# Altium PCB recall_mcu_v0_2.PcbDoc
Units mil, origin at the board's own origin, x right, y up, seen from the top; angles counter-clockwise.
Board outline 1000 x 1000 mil, 2 copper layers (Component Side, Bottom Layer), stack 12.8 mil thick; 13 components, 10 nets, 42 pads, 5 vias.
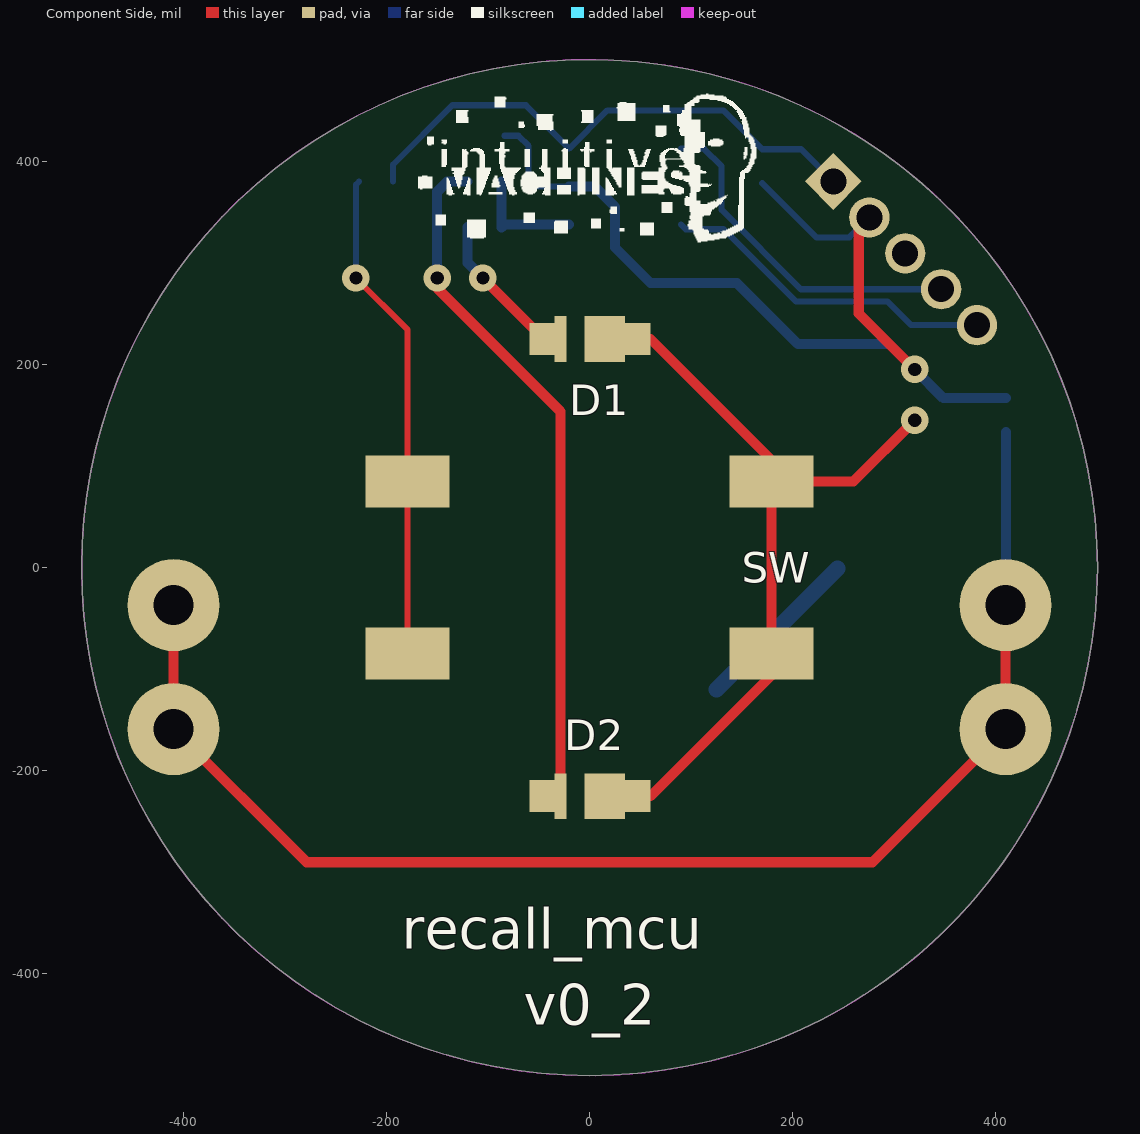
[diagram p0: Component Side view]
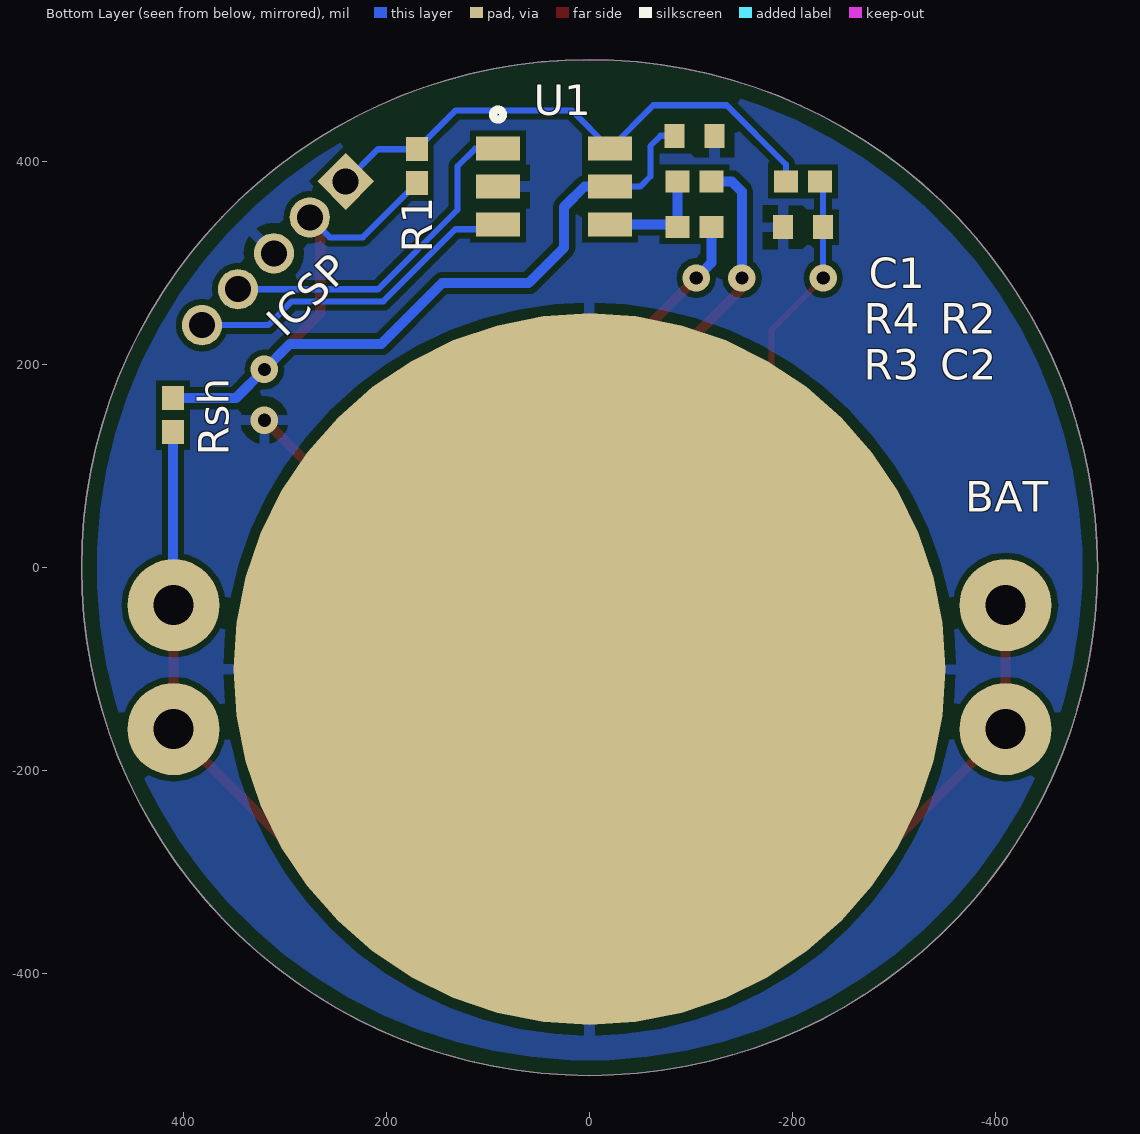
[diagram p1: Bottom Layer view, seen from below]
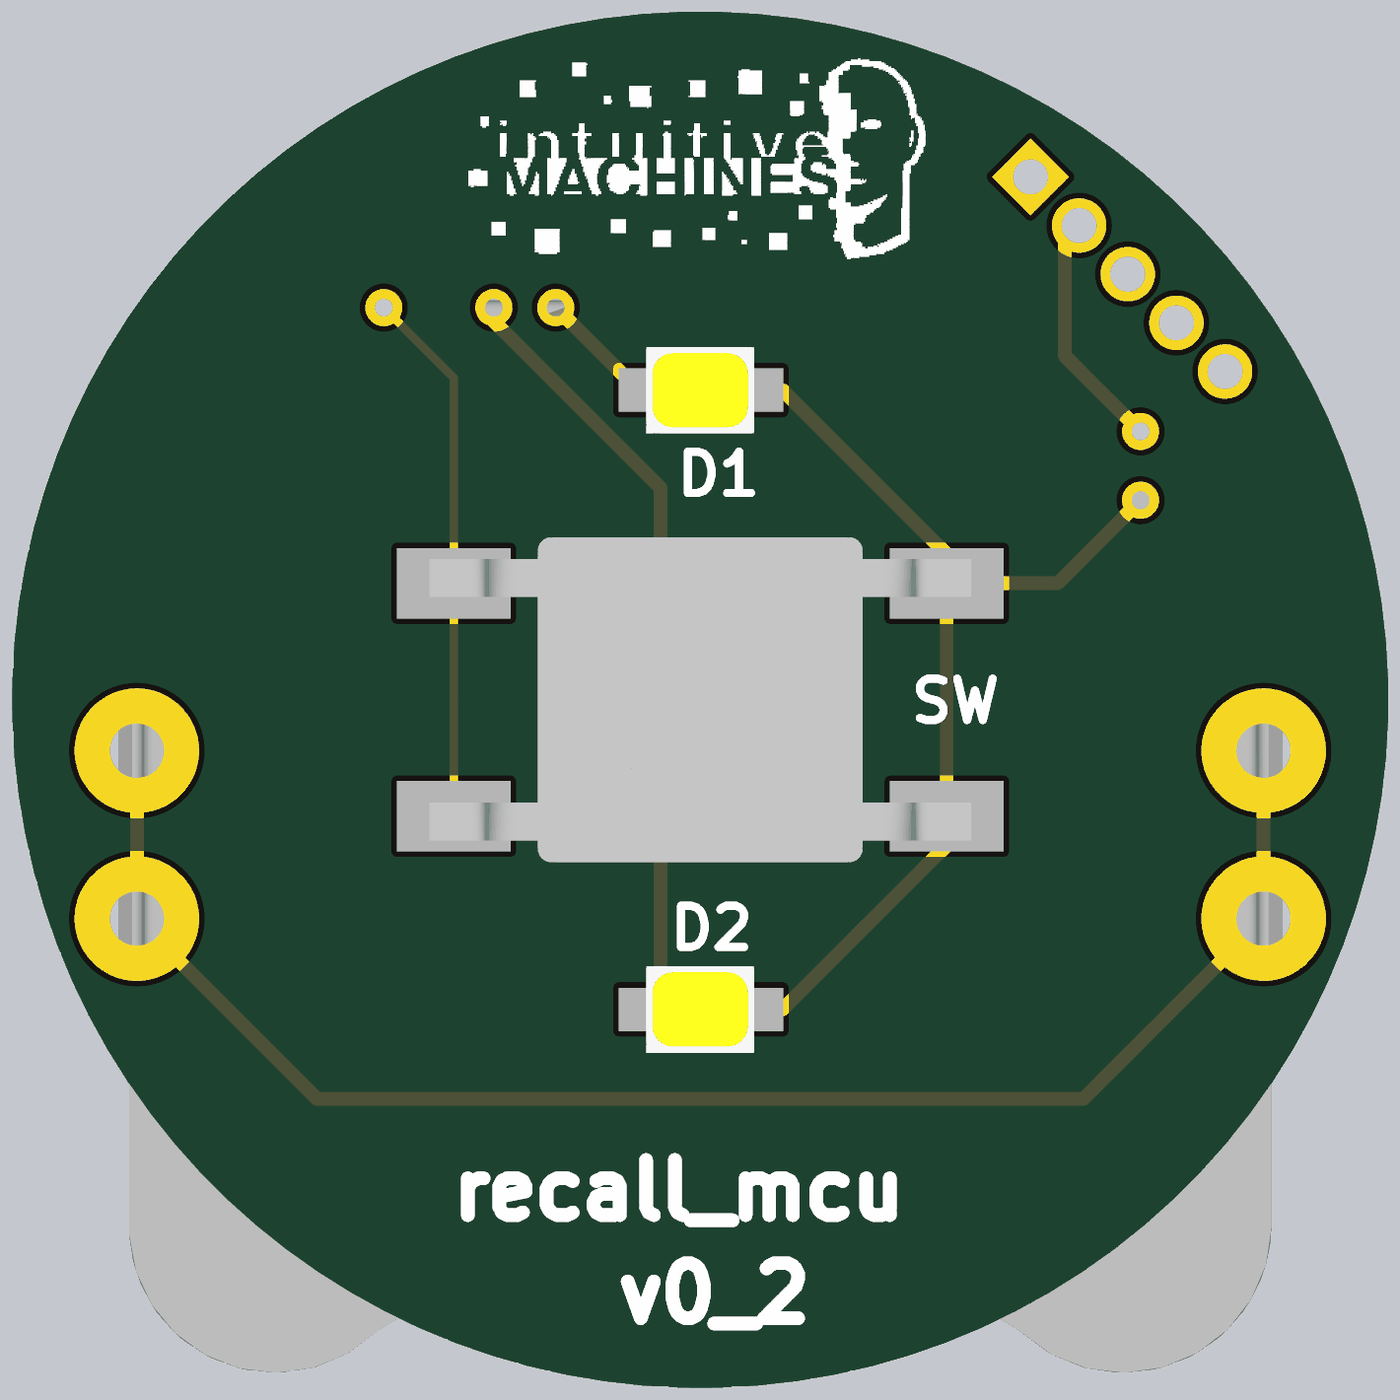
[diagram p2: 3D render of the assembled board from above, using the file's embedded part models]
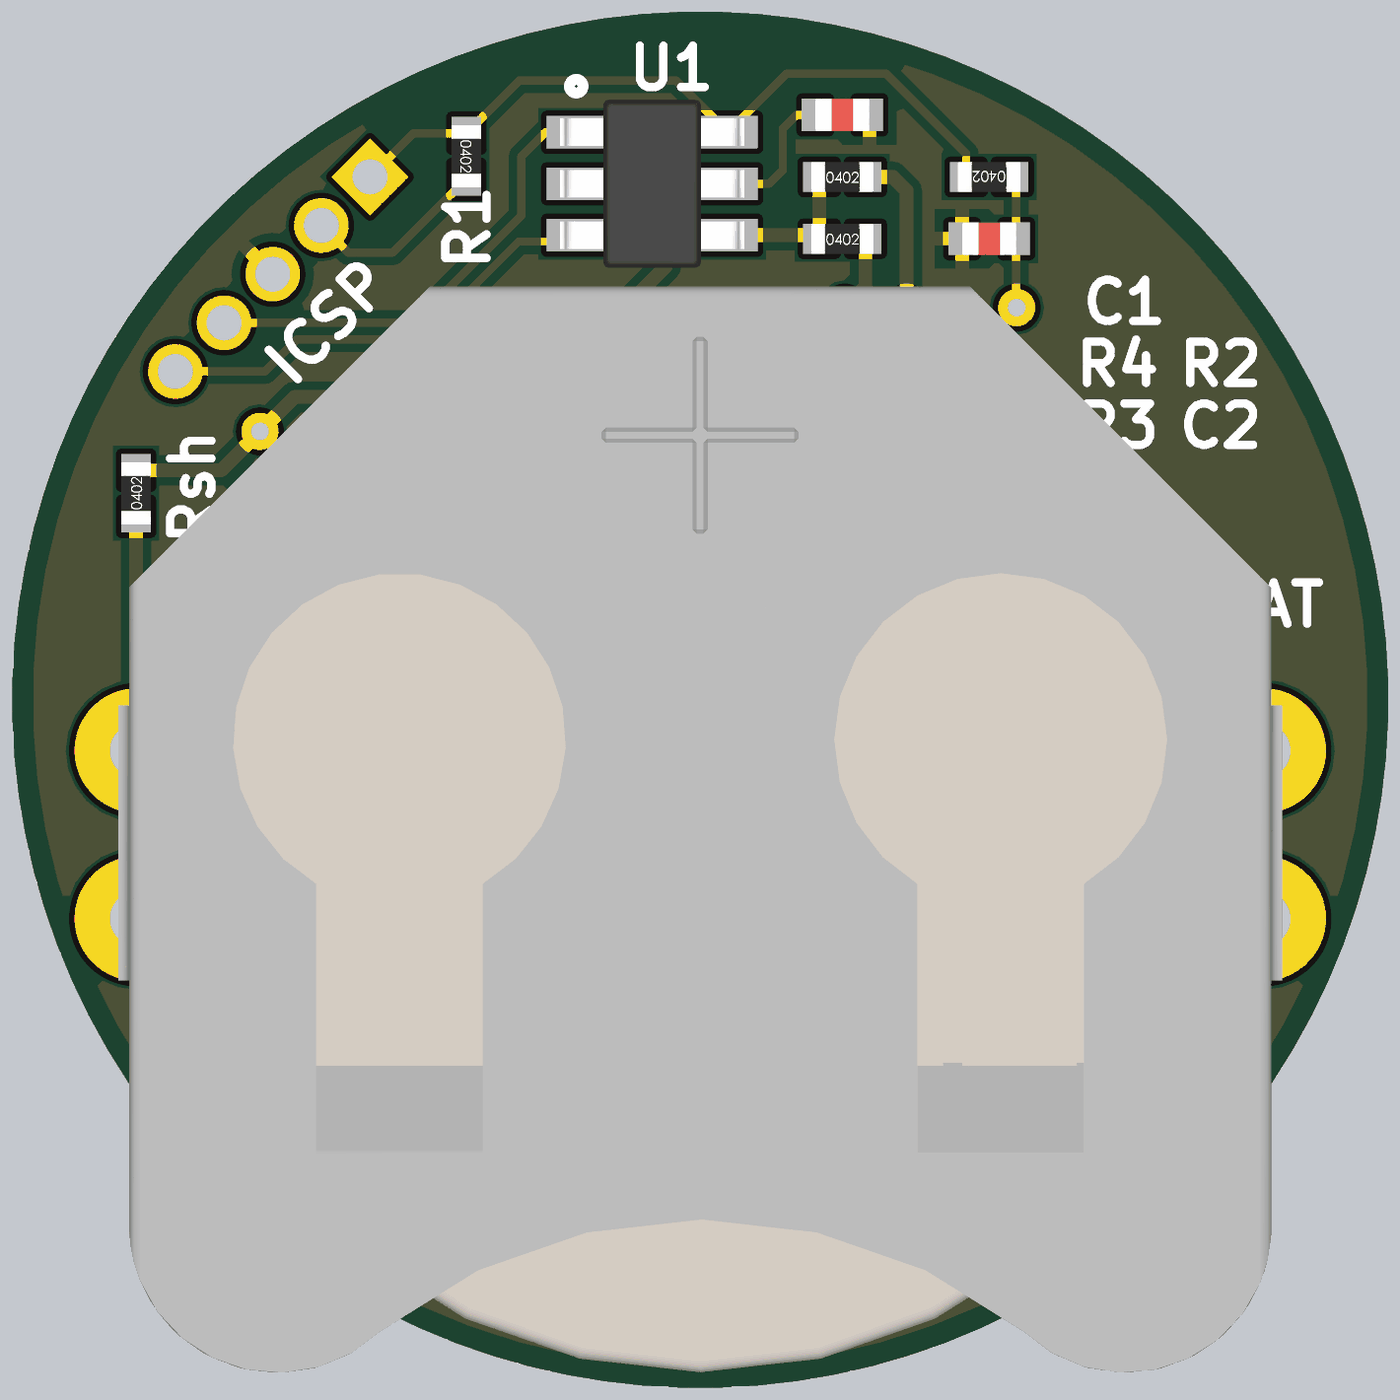
[diagram p3: 3D render of the assembled board from below, using the file's embedded part models]

## Layer stack, top to bottom
Top Solder: solder mask 0.4, Solder Resist, Dk 3.5
Component Side: signal copper 1.4
Dielectric 1: core 10, FR-4, Dk 4.2
Bottom Layer: signal copper 1.4
Solder Side: solder mask 0.4, Solder Resist, Dk 3.5

## Board outline
0,-500 cw(c0,0) -500,0 cw(c0,0) 0,500 cw(c0,0) 500,0 cw(c0,0)

## Design rules (kind name [scope] priority, off if disabled: settings)
BoardOutlineClearance [All] p1: gap=15
Clearance [All] p1: gap=6
HoleSize [All] p1: absolutevalues=TRUE maxlimit=100 minlimit=13 maxpercent=80.000 minpercent=20.000
HoleToHoleClearance [All] p1: gap=6 allowstackedmicrovias=TRUE
MinimumAnnularRing [All] p1: minimumring=7
MinimumSolderMaskSliver [All] p1: minsoldermaskwidth=0
PolygonConnect [All] p1: connectstyle=Relief reliefconductorwidth=10 reliefentries=4 polygonreliefangle="90 Angle" airgapwidth=10
RoomDefinition recall_mcu_v0_2 [InComponentClass('recall_mcu_v0_2')] p1: confinementstyle=ConfineIn formatcopy=TRUE lockcomponents=FALSE outline -3105,-2070 3685,-2070 3685,2625 -3105,2625
RoutingVias [All] p1: holewidth=13 width=27 viastyle="Through Hole" minholewidth=13 minwidth=27 maxholewidth=28 maxwidth=50
SilkToSilkClearance [All] p1: silktosilkclearance=6
SilkToSolderMaskClearance [IsPad] p1: minsilkscreentomaskgap=6 clearancetoexposedcopper=TRUE
SolderMaskExpansion [All] p1: expansion=4
Width [All] p1: maxlimit=50 minlimit=6 preferedwidth=6
25 further rules are at their usual default settings.

## Components (designator, comment, footprint, x,y, rotation, side; value= is the part's Value field where it differs from the comment)
BAT "CR2032" BAT-HLD-001-THM 0,-100 r0 bottom locked
C1 "CAP" CAP_0402R -103.27,425 r0 bottom
C2 "CAP" CAP_0402R -210,335 r180 bottom
D1 "MP2016" MP2016_centered 0,225 r180 top
D2 "MP2016" MP2016_centered 0,-225 r180 top
ICSP "Header 5" HDR1X5_ICSP 240,380 r315 bottom
R1 "RES" RES_0402 170,395 r270 bottom
R2 "RES" RES_0402 -210,380 r0 bottom
R3 "RES" RES_0402 -103.27,335 r180 bottom
R4 "RES" RES_0402 -103.27,380 r180 bottom
Rsh "RES" RES_0402 410,150 r90 bottom
SW "4-1437565-1" 4-1437565-1 0,0 r90 top
U1 "PIC10F320" SOT-23-6 35,375 r180 bottom

## Footprints (in the part's own frame and the unit in brackets; to place one, negate y for a bottom-side part, rotate by r counter-clockwise, add the part's x,y. Pads: shape width x height; smd on the part's side, far side on the other; paste and mask are expansions set on the pad)
4-1437565-1 [mm] "TE Tactile Switch, 6mm x 6mm x 4mm"
  rect 1.3x2.1 smd: 1(-2.15,4.55) 1(2.15,4.55) 2(-2.15,-4.55) 2(2.15,-4.55)
  body extent -3,-5 3,5, height 5.05
BAT-HLD-001-THM [mm] "Battery holder for CR2032"
  round 2.3 hole 1: 1(-10.4,-1.6) 1(-10.4,1.5) 1(10.4,-1.6) 1(10.4,1.5)
  round 17.8 smd: 2(0,0)
  body extent -10.74,-10.17 10.74,9.88, height 3.96
CAP_0402R [mm] "Capacitor 0402 reflow soldering"
  rect 0.5x0.6 smd: 1(-0.5,0) 2(0.5,0)
  body extent -0.5,-0.3 0.5,0.3, height 0.2
HDR1X5_ICSP [mm] "Connector; Header; 1x5Position"
  rect 1.006x1.006 hole 0.65: 1(0,0)
  round 1.006 hole 0.65: 2(1.27,0) 3(2.54,0) 4(3.81,0) 5(5.08,0)
MP2016_centered [mm] "Luminus XNOVA LED"
  rect 0.3x1.14 smd: A(0.731,0)
  rect 1.02x1.14 smd: C(-0.379,0)
  rect 0.65x0.8 smd: ""(-1.204,0) ""(1.181,0)
  body extent -1,-0.8 1,0.8, height 0.55
RES_0402 [mm]
  rect 0.6x0.55 smd: 1(-0.425,0) 2(0.425,0)
  body extent -0.58,-0.28 0.57,0.27, height 0.41
SOT-23-6 [mm] "PIC10F320"
  rect 1.1x0.6 smd: 1(-1.4,0.95) 2(-1.4,0) 3(-1.4,-0.95) 4(1.4,-0.95) 5(1.4,0) 6(1.4,0.95)
  silkscreen extent -1.53,1.68 -1.28,1.92, body extent -1.7,-1.55 1.7,1.55, height 1.14

## Part data
BAT: library part Battery
C1 C2: "Capacitor"
D1 D2: "MP2016 White LED"
ICSP: "Header, 5-Pin"
R1 R2 R3 R4 Rsh: "Resistor"
SW: library part SW-TACT, "Translucent Conductive Silicone Elastomer Switch"
U1: "6-Pin Flash-Based, 8-Bit Microcontroller"

## Via types
v1: diameter 27, hole 13, Component Side to Bottom Layer, 5 vias

## Nets (pads, with @x,y where several pads share a name; then routed paths per layer and width w, separated by ;. In a path a pad name is that pad's centre, name@x,y a point inside that pad or via, vN(x,y) a via of type N, cw(c..) or ccw(c..) an arc to the next point about the centre after c; other vN are vias at no path point)
GND: BAT.2 C1.1 C2.1 D1.@47.42,225 D1.C D2.@47.42,-225 D2.C ICSP.3 SW.2 U1.2 | length 960.5
  Component Side w10: D2.C 47.42,-225 60,-225 179.13,-105.87 179.13,-84.65 SW.2@179.13,84.65 ; D1.@47.42,225 60,225 179.13,105.87 SW.2@179.13,84.65 ; v1(320,145) 259.65,84.65 SW.2@179.13,84.65
  Bottom Layer w6: ICSP.3 ICSP.3@315.71,314.29
  Bottom Layer w10: ICSP.3@301.42,300 ICSP.3
  Bottom Layer w15.75: BAT.2@125,-120 BAT.2@243.83,-1.17
ICSP_CLK: ICSP.5 U1.3 | length 332.3
  Bottom Layer w6: U1.3 94.72,333 132,333 203.07,261.93 293.07,261.93 316.42,238.58 ICSP.5
ICSP_DAT: ICSP.4 U1.1 | length 340
  Bottom Layer w6: U1.1 112.6,412.4 130,395 130,351.97 208.04,273.93 ICSP.4 ; ICSP.4@350,285 ICSP.4@351.07,283.93
NetC2_2: C2.2 R2.1 SW.1 | length 487.1
  Component Side w6: v1(-230,285) -179.13,234.13 -179.13,84.65 SW.1@-179.13,-84.65
  Bottom Layer w6: v1(-230,285) -229.69,285.31 C2.2 -229.69,377.05 R2.1
NetD1_A: D1.@-46.48,225 D1.A R3.2 | length 157.3
  Component Side w10: v1(-105,285) -45,225 D1.A
  Bottom Layer w10: R3.2 -120,300 v1(-105,285)
NetD2_A: D2.@-46.48,-225 D2.A R4.2 | length 679.4
  Component Side w10: v1(-150,285) -150,275 -28.76,153.76 D2.A
  Bottom Layer w10: v1(-150,285) -150,370 -140,380 R4.2
NetR3_1: R3.1 R4.1 U1.4 | length 112.5
  Bottom Layer w10: R4.1 R3.1 -83.94,337.6 U1.4
VBAT: BAT.1 Rsh.1 | length 1361.2
  Component Side w10: BAT.1@-409.45,-37.01 -409.45,-159.06 -278.5,-290 278.5,-290 409.45,-159.06 BAT.1@409.45,-37.01
  Bottom Layer w10: BAT.1@410,-56.46 Rsh.1
VDD: C1.2 ICSP.2 R1.2 Rsh.2 U1.5 | length 953.8
  Component Side w10: ICSP.2 265,334.29 265,250 v1(320,195)
  Bottom Layer w6: C1.2 -70,425 -60,415 -60,385 -50,375 U1.5 ; R1.2 223.27,325 255.71,325 ICSP.2
  Bottom Layer w10: U1.5 5,375 25,355 25,315 60,280 145,280 205,220 295,220 v1(320,195) 348.27,166.73 Rsh.2
VPP: ICSP.1 R1.1 R2.2 U1.6 | length 536.3
  Bottom Layer w6: R2.2 -193.27,396.73 -135,455 -62.72,455 U1.6 17.48,450 131.73,450 R1.1 208.27,411.73 ICSP.1

## Polygon pours and split planes (outlines as drawn)
GND on Bottom Layer "Ground" (solid, remove dead copper, pour order 4): 0,-500 cw(c0,0) -500,0 cw(c0,0) 0,500 cw(c0,0) 500,0 cw(c0,0)

## Keep-outs
Keep-Out Layer:
  circle w1: c0,0 r500

## Silkscreen, mask and mechanical layers (free items; w line width, h text height)
Top Overlay:
  drawing of 44 lines, arcs and shapes, not listed
  text "recall_mcu" at -185,-375 h40
  text "v0_2" at -65,-450 h40